# Altium PCB PCB1.PcbDoc
Units mm, origin at the board's own origin, x right, y up, seen from the top; angles counter-clockwise.
Board outline 25.91 x 51.05 mm, 2 copper layers (Top Layer, Bottom Layer); 22 components, 29 nets, 109 pads, 136 vias.
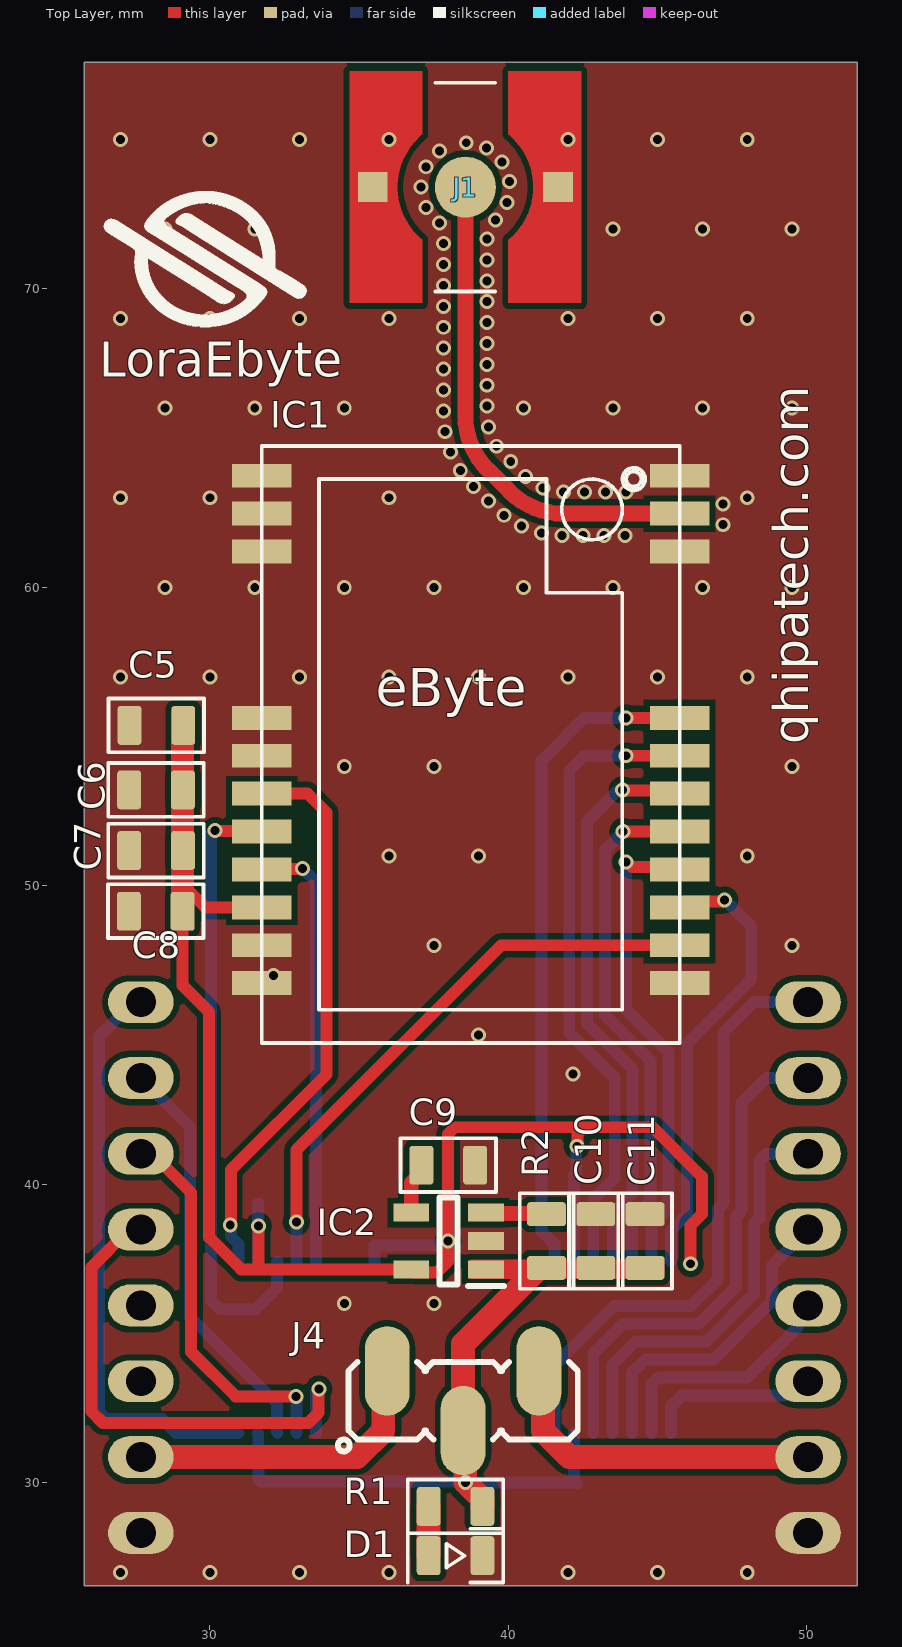
[diagram p0: Top Layer view]
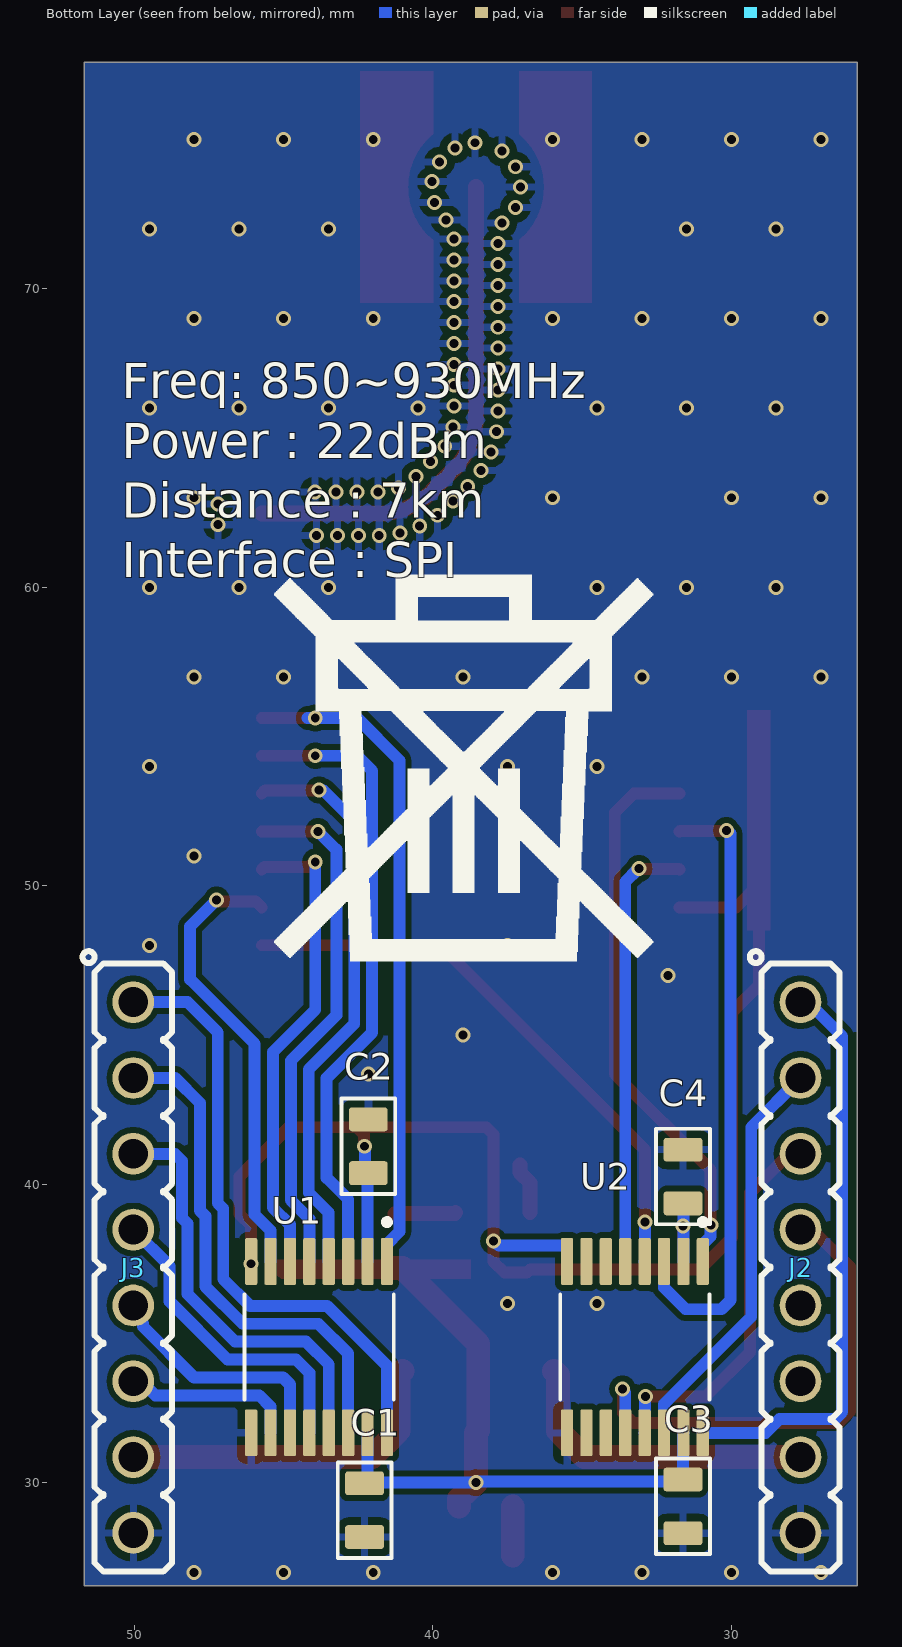
[diagram p1: Bottom Layer view, seen from below]
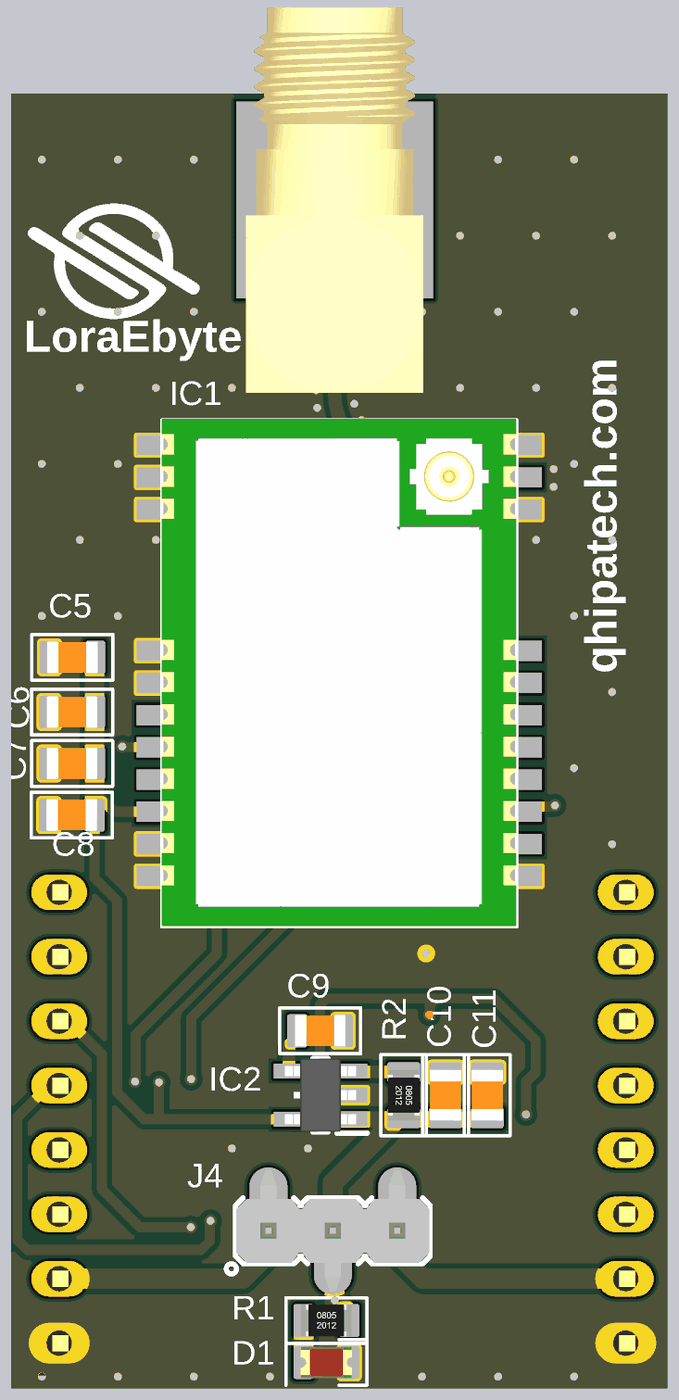
[diagram p2: 3D render of the assembled board from above, using the file's embedded part models]
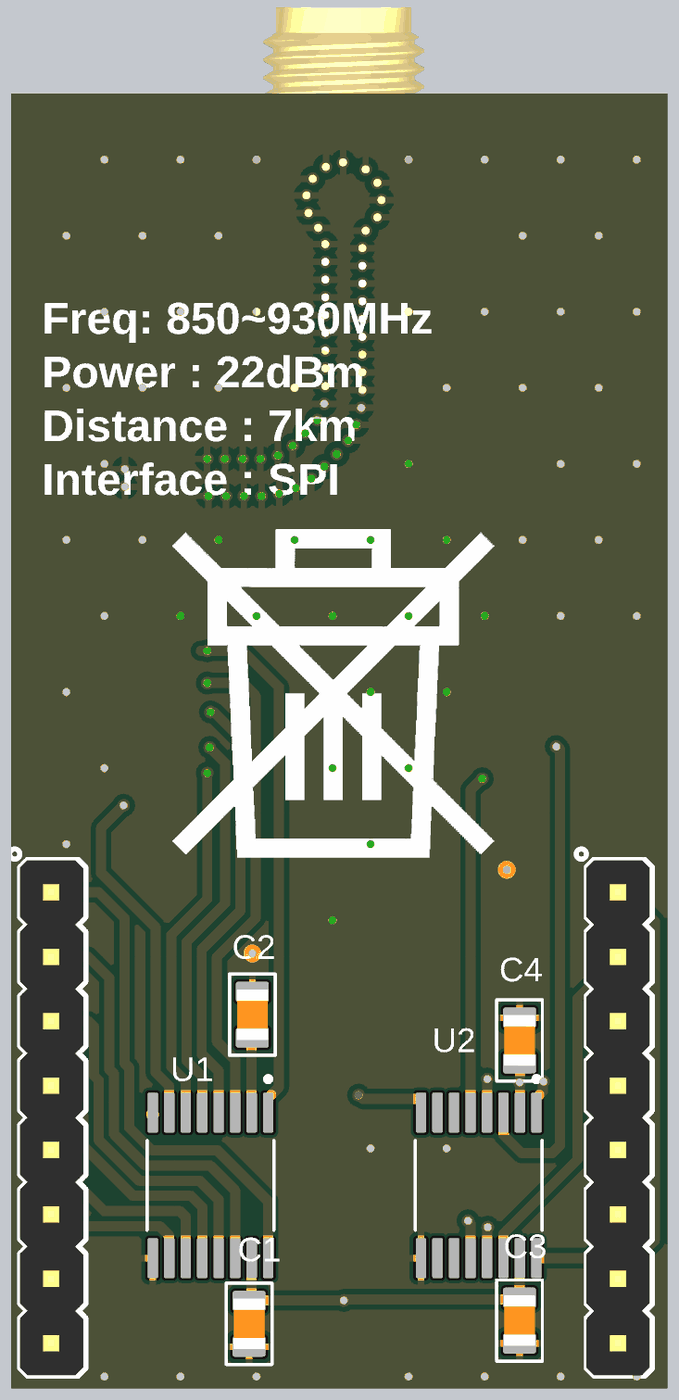
[diagram p3: 3D render of the assembled board from below, using the file's embedded part models]

## Layer stack, top to bottom
Top Solder: solder mask 0.0102, Solder Resist, Dk 3.5
Top Layer: signal copper 0.0356
Dielectric 1: dielectric 0.32, FR-4, Dk 4.8
Bottom Layer: signal copper 0.0356
Bottom Solder: solder mask 0.0102, Solder Resist, Dk 3.5

## Board outline
25.781,26.543 25.781,77.597 51.689,77.597 51.689,26.543

## Design rules (kind name [scope] priority, off if disabled: settings)
Clearance [All] p1: gap=0.2 ignorepadtopadclearanceinfootprint=FALSE
PlaneConnect [All] p1: planeconnectstyle=Direct reliefexpansion=0.508 reliefentries=4 reliefconductorwidth=0.254 reliefairgap=0.254
PolygonConnect [All] p1: connectstyle=Direct reliefconductorwidth=0.254 reliefentries=4 polygonreliefangle="90 Angle" airgapwidth=0.254
RoutingVias [All] p1: holewidth=0.711 width=1.27 viastyle="Through Hole" minholewidth=0.711 minwidth=1.27 maxholewidth=0.711 maxwidth=1.27
SolderMaskExpansion [All] p1: expansion=0.102 istentingtop=FALSE
Width Impedancia [InNet('ant')] p1: maxlimit=0.535 minlimit=0.535 preferedwidth=0.535 impedanceprofiledriven=TRUE impedanceprofileid={C3775781-332B-4FDC-A80B-6E66D68CC3F6} impedanceprofilevalue=50.000000 minimp=50.000000 maximp=50.000000 favimp=50.000000
Width [All] p2: maxlimit=0.8 minlimit=0.4 preferedwidth=0.5
29 further rules are at their usual default settings.

## Components (designator, comment, footprint, x,y, rotation, side; value= is the part's Value field where it differs from the comment)
C1 "100nF" C0805 42.291,29.083 r90 bottom
C2 "100nF" C0805 42.164,41.275 r270 bottom
C3 "100nF" C0805 31.623,29.21 r90 bottom
C4 "100nF" C0805 31.623,40.259 r270 bottom
C5 "100nF" C0805 28.205,55.372 r0 top
C6 "100nF" C0805 28.194,53.213 r0 top
C7 "100nF" C0805 28.194,51.181 r0 top
C8 "100nF" C0805 28.183,49.149 r0 top
C9 "100nF" C0805 37.984,40.64 r180 top
C10 "100nF" C0805 42.926,38.1 r270 top
C11 "100nF" C0805 44.577,38.1 r270 top
D1 "LED" LED-0805 38.227,27.559 r180 top
IC1 "E22-900M22S" E22-900M22S 38.735,54.737 r180 top
IC2 "LP2985IM5-3.0_NOPB" SOT95P280X145-5N 37.993,38.1 r180 top
J1 "CONSMA002-SMD-G" LINX_CONSMA002-SMD-G 38.556,73.406 r180 top
J2 "HDR1X8" HDR_M_1X8 27.686,37.211 r270 bottom value=HDRM8
J3 "HDR1X8" HDR_M_1X8 50.038,37.211 r270 bottom value=HDRM8
J4 "HDRM3" HDRS_M_1X3 38.481,32.75 r0 top
R1 "1k0" R0805 38.227,29.21 r0 top
R2 "1k0" R0805 41.275,38.1 r270 top
U1 "TXB0106PWR" SOP65P640X120-16N 43.815,34.544 r270 bottom
U2 "TXB0106PWR" SOP65P640X120-16N 33.233,34.544 r270 bottom

## Footprints (in the part's own frame and the unit in brackets; to place one, negate y for a bottom-side part, rotate by r counter-clockwise, add the part's x,y. Pads: shape width x height; smd on the part's side, far side on the other; paste and mask are expansions set on the pad)
C0805 [mm] "Ceramic capacitor 0805"
  rrect25% 0.8x1.3 smd: 1(-0.9,0) 2(0.9,0)
  silkscreen extent -1.6,-0.9 1.6,0.9, body extent -1,-0.62 1,0.63, height 0.8
E22-900M22S [mm]
  rect 2x0.8 smd: 1(7,-9) 2(7,-7.73) 3(7,-6.46) 4(7,-0.89) 5(7,0.38) 6(7,1.65) 7(7,2.92) 8(7,4.19) 9(7,5.46) 10(7,6.73) 11(7,8) 12(-7,8) 13(-7,6.73) 14(-7,5.46) 15(-7,4.19) 16(-7,2.92) 17(-7,1.65) 18(-7,0.38) 19(-7,-0.89) 20(-7,-6.46) 21(-7,-7.73) 22(-7,-9)
  silkscreen extent -7,-10 7,10, body extent -6.99,-10.03 7.02,9.97, height 3.1
HDR_M_1X8 [mm] "Connector; Header; 8 Position"
  round 1.4 / inner round 1.4 / far side oval 1.4x2.2 hole 1 mask+0.1: 1(-8.89,0) 2(-6.35,0) 3(-3.81,0) 4(-1.27,0) 5(1.27,0) 6(3.81,0) 7(6.35,0) 8(8.89,0)
  silkscreen extent -10.6,-1.7 10.19,1.3, body extent -10.16,-1.3 10.16,1.19, height 8.54
HDRS_M_1X3 [mm] "HEADER, 2.54mm pitch, straight, SMD"
  oval 1.5x3 smd: 1(-2.54,1) 2(0,-1) 3(2.54,1)
  silkscreen extent -4.2,-1.7 3.84,1.3, body extent -3.81,-2.4 3.81,2.4, height 9.68
LED-0805 [mm] "SMT LED DIODE 0805"
  rrect25% 0.8x1.3 smd: 1(-0.9,0) 2(0.9,0)
  silkscreen extent -1.6,-0.9 1.6,0.9, body extent -1.01,-0.62 1.01,0.63, height 1.1
LINX_CONSMA002-SMD-G [mm]
  round 2.05 smd: 1(0,0)
  rect 1x1 smd paste-1 mask+0: S1(-3.1,0) S2(3.1,0)
  Top Layer region: 3.88,-3.88 1.44,-3.88 1.44,-1.77 1.503,-1.716 1.553,-1.67 1.601,-1.623 1.648,-1.575 1.694,-1.525 1.738,-1.474 1.78,-1.422 1.821,-1.368 1.861,-1.314 1.899,-1.258 1.935,-1.201 1.97,-1.143 2.002,-1.084 2.033,-1.025 2.063,-0.964 2.09,-0.902 2.116,-0.84 2.14,-0.777 2.162,-0.713 2.183,-0.649 2.201,-0.584 2.218,-0.519 2.232,-0.453 2.245,-0.387 2.256,-0.32 2.264,-0.253 2.271,-0.186 2.276,-0.119 2.279,-0.052 2.28,0 2.279,0.052 2.276,0.119 2.271,0.186 2.264,0.253 2.256,0.32 2.245,0.387 2.232,0.453 2.218,0.519 2.201,0.584 2.183,0.649 2.162,0.713 2.14,0.777 2.116,0.84 2.09,0.902 2.063,0.964 2.033,1.025 2.002,1.084 1.97,1.143 1.935,1.201 1.899,1.258 1.861,1.314 1.821,1.368 1.78,1.422 1.738,1.474 1.694,1.525 1.648,1.575 1.601,1.623 1.553,1.67 1.503,1.716 1.44,1.77 1.44,2.35 1.44,3.88 3.88,3.88
  Top Layer region: -1.44,1.77 -1.503,1.716 -1.553,1.67 -1.601,1.623 -1.648,1.575 -1.694,1.525 -1.738,1.474 -1.78,1.422 -1.821,1.368 -1.861,1.314 -1.899,1.258 -1.935,1.201 -1.97,1.143 -2.002,1.084 -2.033,1.025 -2.063,0.964 -2.09,0.902 -2.116,0.84 -2.14,0.777 -2.162,0.713 -2.183,0.649 -2.201,0.584 -2.218,0.519 -2.232,0.453 -2.245,0.387 -2.256,0.32 -2.264,0.253 -2.271,0.186 -2.276,0.119 -2.279,0.052 -2.28,0 -2.279,-0.052 -2.276,-0.119 -2.271,-0.186 -2.264,-0.253 -2.256,-0.32 -2.245,-0.387 -2.232,-0.453 -2.218,-0.519 -2.201,-0.584 -2.183,-0.649 -2.162,-0.713 -2.14,-0.777 -2.116,-0.84 -2.09,-0.902 -2.063,-0.964 -2.033,-1.025 -2.002,-1.084 -1.97,-1.143 -1.935,-1.201 -1.899,-1.258 -1.861,-1.314 -1.821,-1.368 -1.78,-1.422 -1.738,-1.474 -1.694,-1.525 -1.648,-1.575 -1.601,-1.623 -1.553,-1.67 -1.503,-1.716 -1.44,-1.77 -1.44,-3.88 -3.88,-3.88 -3.88,3.88 -1.44,3.88
  silkscreen extent -1,-3.5 1,3.5, body extent -3.5,-7.6 3.5,7.6, height 10.8
R0805 [mm] "SMD RESISTOR 0805"
  rrect25% 0.8x1.3 smd: 1(-0.9,0) 2(0.9,0)
  silkscreen extent -1.6,-0.9 1.6,0.9, body extent -1,-0.62 1,0.63, height 0.45
SOP65P640X120-16N [mm]
  rrect25% 1.57x0.41 smd: 1(-2.87,2.275) 2(-2.87,1.625) 3(-2.87,0.975) 4(-2.87,0.325) 5(-2.87,-0.325) 6(-2.87,-0.975) 7(-2.87,-1.625) 8(-2.87,-2.275) 9(2.87,-2.275) 10(2.87,-1.625) 11(2.87,-0.975) 12(2.87,-0.325) 13(2.87,0.325) 14(2.87,0.975) 15(2.87,1.625) 16(2.87,2.275)
  silkscreen extent -4.29,-2.5 1.77,2.5
SOT95P280X145-5N [mm]
  rect 1.2x0.6 smd: 1(-1.25,0.95) 2(-1.25,0) 3(-1.25,-0.95) 4(1.25,-0.95) 5(1.25,0.95)
  silkscreen extent -1.85,-1.45 0.3,1.5, body extent -1.4,-1.45 1.4,1.45, height 1.2

## Part data
C1 C2 C3 C4 C5 C6 C7 C8 C9 C10 C11: library part Capacitor, "Capacitor without polarity", Voltage=25V
D1: "LED - Light-Emitting Diode"
IC1: "SX1262 868/915MHz SPI SMD LoRa Module", Package=Package, Availability=Unavailable, Check_prices=https://www.snapeda.com/parts/E22-900M22S/EBYTE/view-part/5137737/?ref=eda, MF=EBYTE, MP=E22-900M22S, Price=None, SnapEDA_Link=https://www.snapeda.com/parts/E22-900M22S/EBYTE/view-part/5137737/?ref=snap
IC2: "Integrated Circuit", Arrow Part Number=LP2985IM5-3.0/NOPB, Manufacturer_Name="Texas Instruments", Mouser Part Number=926-LP2985IM53.0NOPB, Arrow Price/Stock=https://www.arrow.com/en/products/lp2985im5-3.0nopb/texas-instruments, Datasheet Link=http://www.ti.com/lit/ds/symlink/lp2985-n.pdf, Height=1.45mm, Manufacturer_Part_Number=LP2985IM5-3.0/NOPB, Mouser Price/Stock=https://www.mouser.co.uk/ProductDetail/Texas-Instruments/LP2985IM5-3.0-NOPB?qs=7lkVKPoqpbYZPGAMtqQXkQ%3D%3D
J1: "SMA Female Right-Angle Surface-Mount Connector, Gold", Package=None, Check_prices=https://www.snapeda.com/parts/CONSMA002-SMD-G/Linx+Technologies+Inc./view-part/?ref=eda, MF="Linx Technologies", MP=CONSMA002-SMD-G, SnapEDA_Link=https://www.snapeda.com/parts/CONSMA002-SMD-G/Linx+Technologies+Inc./view-part/?ref=snap
J2 J3: library part "Header Male THT 1x8", "CONN, HEADER, Male, pitch: 2.54mm, 8POS"
J4: library part "Header Male 1x3 smd", "CONN, HEADER, Male, pitch: 2.54mm, 3POS, SMD", ASSEMBLY=ASSEMBLY, DESC=DESCRIPTION, MANF=MOLEX, MANF_P#=87898-0304, PARAM=PARAM, Price=0.5$
R1 R2: library part Resistor, "Single resistor", Power=0.125W, Unit price=0.1
U1 U2: "6-Bit Bidirectional Voltage-Level Translator with Auto Direction Sensing and +/-15-kV ESD Protect 16-TSSOP -40 to 85", Package="TSSOP-16 Texas Instruments", Availability=Warning, BuyPart=https://www.snapeda.com/parts/TXB0106PWR/Texas%20Instruments/view-part/134340/?ref=eda, DigiKey-Purchase-URL=https://snapeda.com/shop?store=DigiKey&id=134340, MF="Texas Instruments", Mouser-Purchase-URL=https://snapeda.com/shop?store=Mouser&id=134340, MP=TXB0106PWR, Price=None, SnapEDA_Link=https://www.snapeda.com/parts/TXB0106PWR/Texas%20Instruments/view-part/134340/?ref=snap, Texas_Instruments-Purchase-URL=https://snapeda.com/shop?store=Texas+Instruments&id=134340

## Via types
v1: diameter 0.5, hole 0.3, Top Layer to Bottom Layer, tented both sides, 134 vias
v2: diameter 0.5, hole 0.3, Top Layer to Bottom Layer, 2 vias

## Nets (pads, with @x,y where several pads share a name; then routed paths per layer and width w, separated by ;. In a path a pad name is that pad's centre, name@x,y a point inside that pad or via, vN(x,y) a via of type N, cw(c..) or ccw(c..) an arc to the next point about the centre after c; other vN are vias at no path point)
+3V3: C2.2 C4.2 C5.2 C6.2 C7.2 C8.2 IC1.9 IC2.5 U1.2 U1.8 U2.2 U2.8 | length 51.8
  Top Layer w0.4: C8.2 29.083,46.66 29.972,45.771 29.972,38.222 31.044,37.15 31.623,37.15 ; C7.2 29.094,50.027 29.844,49.277 IC1.9 ; v1(31.623,38.608) 31.623,37.15 ; v1(42.291,41.275) 42.31,41.294 42.31,41.675 42.545,41.91 ; v1(46.101,37.338) 46.101,38.622 46.482,39.003 46.482,40.259 44.831,41.91 42.545,41.91 ; 31.623,37.15 IC2.5 36.843,37.05 37.612,37.05 37.973,37.411 v1(37.973,38.1) 37.973,41.676 38.207,41.91 42.545,41.91
  Bottom Layer w0.4: U2.2 31.608,39.344 C4.2 ; U2.8 35.508,37.943 35.513,37.948 37.794,37.948 37.946,38.1 v1(37.973,38.1) ; U1.2 42.19,40.284 42.272,40.366 42.272,41.256 v1(42.291,41.275)
ant: IC1.21 J1.1 | length 16.6
  Top Layer w0.535: J1.1 38.556,65.747 ccw(c41.096,65.747) 39.3,63.951 40.04,63.211 ccw(c41.836,65.007) 41.836,62.467 IC1.21
BUSY: IC1.14 U1.7 | length 15.2
  Top Layer w0.4: IC1.14 45.935,49.477 47.164,49.477 47.217,49.53 v1(47.244,49.53)
  Bottom Layer w0.4: U1.7 45.445,37.419 45.445,38.454 45.974,38.983 45.974,44.704 48.133,46.863 48.133,48.641 v1(47.244,49.53)
DIO1: IC1.13 U2.4 | length 19.4
  Top Layer w0.4: v1(32.893,38.735) 32.893,41.148 39.752,48.007 IC1.13
  Bottom Layer w0.4: v1(32.893,38.735) 32.903,38.725 32.903,37.419 U2.4
DIO2: IC1.8 U2.5 | length 14.7
  Top Layer w0.4: IC1.8 31.75,50.562 33.078,50.562 v1(33.093,50.578)
  Bottom Layer w0.4: v1@33.147,50.546 33.558,50.135 U2.5
GND: C1.1 C2.1 C3.1 C4.1 C5.1 C6.1 C7.1 C8.1 C9.1 C10.1 C11.1 D1.1 IC1.1 IC1.2 IC1.3 IC1.4 IC1.5 IC1.10 IC1.11 IC1.12 IC1.20 IC1.22 IC2.2 J1.S1 J1.S2 J2.8 J3.8 U1.9 U2.9
  other v1: 27,27 30,27 33,27 36,27 42,27 45,27 48,27 34.5,36 37.5,36 39,45 37.5,48 49.5,48 36,51 39,51 48,51 34.5,54 37.5,54 49.5,54 27,57 30,57 33,57 36,57 39,57 42,57 45,57 48,57 28.5,60 31.5,60 34.5,60 37.5,60 40.5,60 43.5,60 46.5,60 49.5,60 41.8,61.734 42.5,61.736 43.2,61.736 43.9,61.736 41.105,61.823 40.443,62.049 47.194,62.096 39.845,62.413 47.194,62.796 39.33,62.887 27,63 30,63 36,63 48,63 41.845,63.198 42.545,63.198 43.245,63.198 43.945,63.198 41.157,63.331 38.835,63.382 40.572,63.715 38.386,63.919 40.076,64.209 38.061,64.539 39.604,64.726 37.868,65.212 39.328,65.369 37.825,65.911 28.5,66 31.5,66 34.5,66 40.5,66 43.5,66 46.5,66 49.5,66 39.287,66.068 37.825,66.611 39.287,66.768 37.825,67.311 39.287,67.468 37.825,68.011 39.287,68.168 37.825,68.711 39.287,68.868 27,69 30,69 33,69 36,69 42,69 45,69 48,69 37.825,69.411 39.287,69.568 37.825,70.111 39.287,70.268 37.825,70.811 39.287,70.968 37.825,71.511 39.287,71.668 28.5,72 31.5,72 43.5,72 46.5,72 49.5,72 37.693,72.198 39.566,72.31 37.232,72.725 39.95,72.895 37.071,73.406 40.028,73.591 37.232,74.087 39.782,74.246 37.693,74.614 39.263,74.716 38.586,74.893 27,75 30,75 33,75 36,75 42,75 45,75 48,75
  other v2: 42.164,43.688 32.131,46.99
M_BUSY: J3.6 U1.10 | length 5.8
  Bottom Layer w0.4: U1.10 45.445,31.679 45.445,32.555 45.818,32.928 49.304,32.928 49.777,33.401 J3.6
M_DIO1: J2.3 U2.13 | length 12.9
  Top Layer w0.4: J2.3 28.067,41.021 29.372,39.716 29.372,34.382 30.861,32.893 v1(32.878,32.893)
  Bottom Layer w0.4: v1(32.878,32.893) 32.878,32.866 32.903,32.841 32.903,31.679 U2.13
M_DIO2: J2.4 U2.12 | length 17.2
  Top Layer w0.4: J2.4 27.286,38.481 26.035,37.23 26.035,32.385 26.416,32.004 33.294,32.004 33.636,32.346 33.636,33.128 v1(33.655,33.147)
  Bottom Layer w0.4: U2.12 33.558,33.023 33.655,33.12 v1(33.655,33.147)
M_MISO: J3.4 U1.12 | length 10.6
  Bottom Layer w0.4: U1.12 44.14,33.686 44.582,34.128 46.875,34.128 48.825,36.078 48.825,37.268 J3.4
M_MOSI: J3.3 U1.13 | length 14.3
  Bottom Layer w0.4: U1.13 43.49,33.965 44.253,34.728 46.627,34.728 48.225,36.326 48.225,38.689 48.409,38.873 48.409,40.787 48.643,41.021 J3.3
M_NRST: J3.5 U1.11 | length 8.2
  Bottom Layer w0.4: U1.11 44.79,33.294 45.024,33.528 48.006,33.528 49.709,35.231 49.709,35.342 50.038,35.67 J3.5
M_NSS: J3.1 U1.16 | length 20.5
  Bottom Layer w0.4: U1.16 41.54,33.92 43.548,35.928 46.13,35.928 47.025,36.823 47.025,39.186 47.209,39.37 47.209,45.09 48.22,46.101 J3.1
M_RXEN: J2.1 U2.16 | length 19.4
  Bottom Layer w0.4: J2.1 27.432,46.101 26.289,44.958 26.289,32.365 26.523,32.131 28.392,32.131 28.849,31.674 U2.16
M_SCK: J3.2 U1.14 | length 17.2
  Bottom Layer w0.4: U1.14 42.84,34.331 43.837,35.328 46.378,35.328 47.625,36.575 47.625,38.937 47.809,39.121 47.809,42.729 48.641,43.561 J3.2
M_TXEN: J2.2 U2.14 | length 13.8
  Bottom Layer w0.4: J2.2 29.337,41.91 29.337,35.56 32.253,32.644 32.253,31.679 U2.14
MISO: IC1.16 U1.5 | length 17.4
  Top Layer w0.4: v1(43.843,51.816) IC1.16
  Bottom Layer w0.4: v1(43.843,51.816) 43.237,51.209 43.237,45.663 44.761,44.139 44.761,39.467 44.14,38.846 U1.5
MOSI: IC1.17 U1.4 | length 19.2
  Top Layer w0.4: v1(43.815,53.213) 43.834,53.194 45.628,53.194 IC1.17
  Bottom Layer w0.4: U1.4 43.495,37.419 43.495,39.05 44.161,39.716 44.161,43.85 42.637,45.374 42.637,52.162 43.669,53.194 43.796,53.194 v1(43.815,53.213)
NetC9_2: C9.2 IC2.4 | length 1.7
  Top Layer w0.5: IC2.4 36.743,40.049 37.084,40.39 C9.2
NetD1_2: D1.2 R1.1 | length 1.7
  Top Layer w0.8: D1.2 R1.1
NetIC2_3: IC2.3 R2.1 | length 2.1
  Top Layer w0.5: IC2.3 39.268,39.025 41.25,39.025 R2.1
NetJ2_7: J2.7 J4.1 | length 10.5
  Top Layer w0.8: J2.7 34.925,30.861 35.807,31.743 35.807,33.616 J4.1
NetJ3_7: J3.7 J4.3 | length 11.3
  Top Layer w0.8: J4.3 41.155,33.616 41.155,31.743 42.037,30.861 J3.7
NRST: IC1.15 U1.6 | length 16.1
  Top Layer w0.4: v1(43.942,50.8) 43.969,50.8 44.135,50.634 45.648,50.634 IC1.15
  Bottom Layer w0.4: v1(43.942,50.8) 43.942,45.847 45.361,44.428 45.361,39.219 44.79,38.648 U1.6
NSS: IC1.19 U1.1 | length 22.4
  Top Layer w0.4: v1(43.942,55.626) IC1.19
  Bottom Layer w0.4: U1.1 41.54,37.994 41.114,38.42 41.114,54.195 42.545,55.626 v1(43.942,55.626) 44.196,55.626
RXEN: IC1.6 U2.1 | length 19
  Top Layer w0.4: v1@30.699,38.608 30.699,40.478 33.909,43.688 33.909,52.451 33.273,53.087 IC1.6
  Bottom Layer w0.4: v1(30.68,38.64) 30.699,38.621 30.699,38.253 30.958,37.994 U2.1
SCK: IC1.18 U1.3 | length 21.3
  Top Layer w0.4: v1(43.942,54.356) IC1.18
  Bottom Layer w0.4: U1.3 42.84,39.494 43.561,40.215 43.561,43.561 42.037,45.085 42.037,53.848 42.545,54.356 v1(43.942,54.356)
TXEN: IC1.7 U2.3 | length 20.8
  Top Layer w0.4: v1(30.172,51.848) 30.188,51.832 31.72,51.832 IC1.7
  Bottom Layer w0.4: v1@30.099,51.816 30.03,51.747 30.03,36.117 30.333,35.814 31.534,35.814 32.253,36.533 32.253,37.409 U2.3
VCC: C1.2 C3.2 C10.2 C11.2 IC2.1 J4.2 R1.2 R2.2 U1.15 U2.15 | length 23.5
  Top Layer w0.8: R1.2 39.127,29.46 38.937,29.65 38.908,29.65 v1(38.554,30.004) 38.554,31.677 J4.2 38.481,34.656 41.025,37.2 R2.2
  Bottom Layer w0.4: U2.15 31.617,31.665 31.617,31.075 31.623,31.069 C3.2 31.686,30.047 38.511,30.047 v1(38.554,30.004) 42.27,30.004 C1.2 ; U1.15 42.19,30.084 C1.2@42.227,30.047
  other v1: 38.554,30.004
pads on no net: J2.5 J2.6 U2.6 U2.7 U2.10 U2.11

## Polygon pours and split planes (outlines as drawn)
GND on Top Layer "GND_L01_P001" (solid, pour order 1): 25.781,26.543 25.781,77.597 51.689,77.597 51.689,26.543
GND on Bottom Layer "GND_L02_P002" (solid, pour order 2): 25.781,26.543 25.781,77.597 51.689,77.597 51.689,26.543

## Other copper
Top Layer:
  region net +3V3: 28.702,55.88 28.702,48.514 29.464,48.514 29.464,55.88
  region net VCC: 38.735,37.465 45.212,37.465 45.212,36.957 45.085,36.83 38.735,36.83

## Silkscreen, mask and mechanical layers (free items; w line width, h text height)
Top Overlay:
  drawing of 2 lines, arcs and shapes, not listed
  text "LoraEbyte" at 26.289,66.663 h2
  text "qhipatech.com" at 50.431,54.737 h2 r90
Bottom Overlay:
  region: 1357 vertices and 8 holes, not listed, extent 32.621,47.467 45.322,60.421
  text "Freq: 850~930MHz / Power : 22dBm / Distance : 7km / Interface : SPI" at 50.419,59.944 h2
Mechanical 1:
  the board outline again, w1

## Text inside footprints (layer, text, board x,y; h text height)
IC1: Top Overlay "eByte" at 35.56,56.007 h1.27